# Altium PCB Can_Transceiver.PcbDoc
Units mm, origin at the board's own origin, x right, y up, seen from the top; angles counter-clockwise.
Board outline 52 x 25.75 mm, 2 copper layers (Top Layer, Bottom Layer); 13 components, 15 nets, 79 pads, 10 vias.
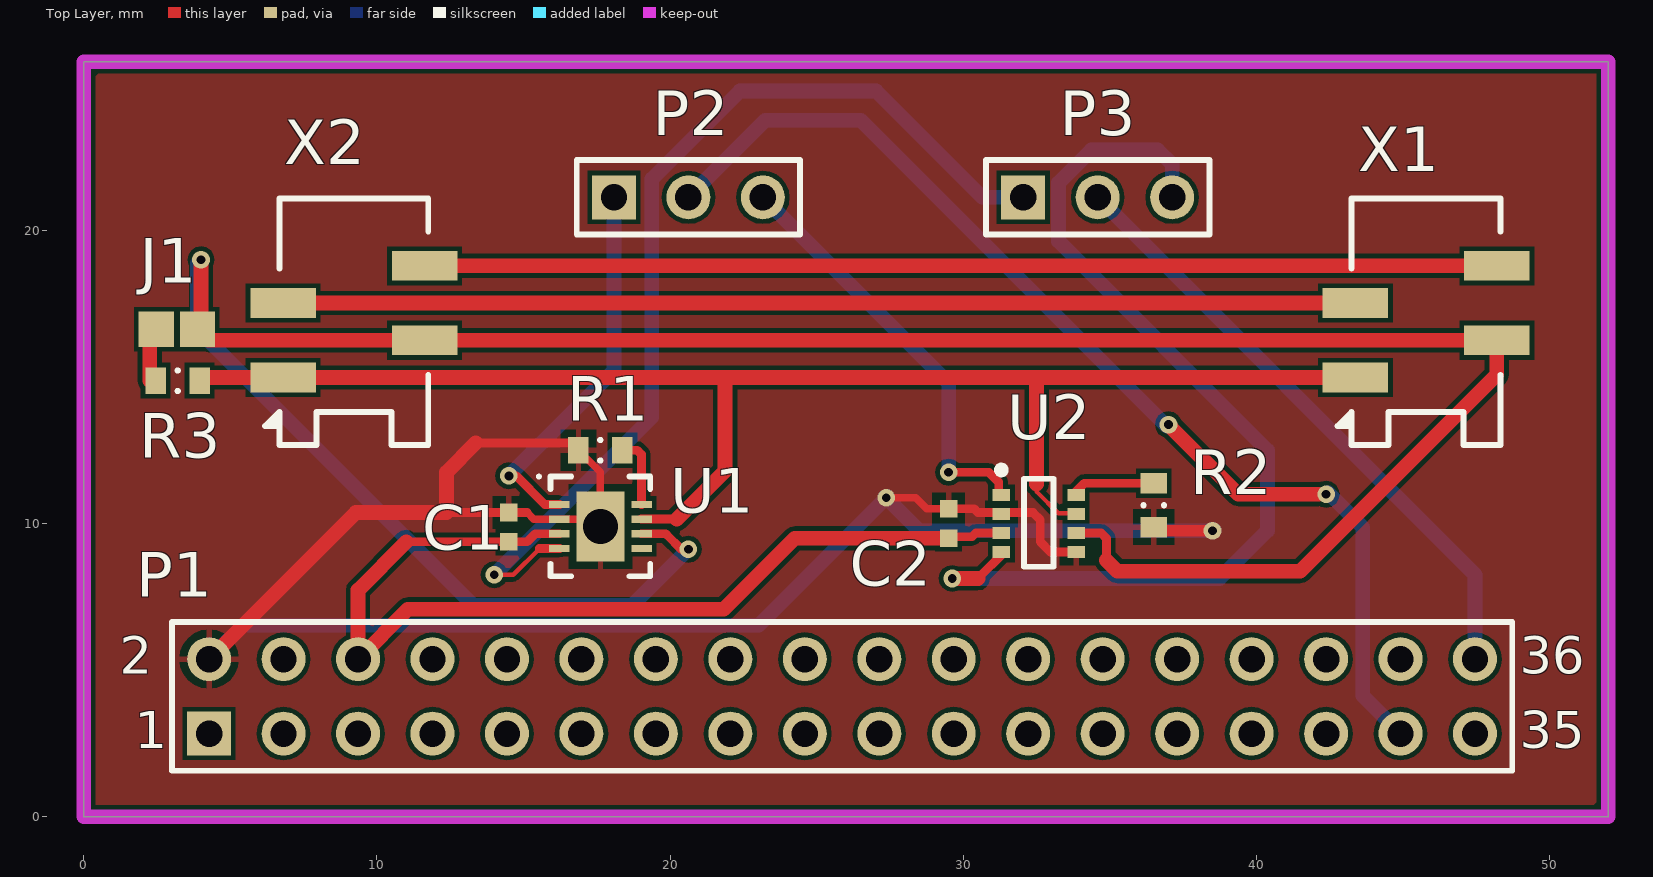
[diagram p0: Top Layer view]
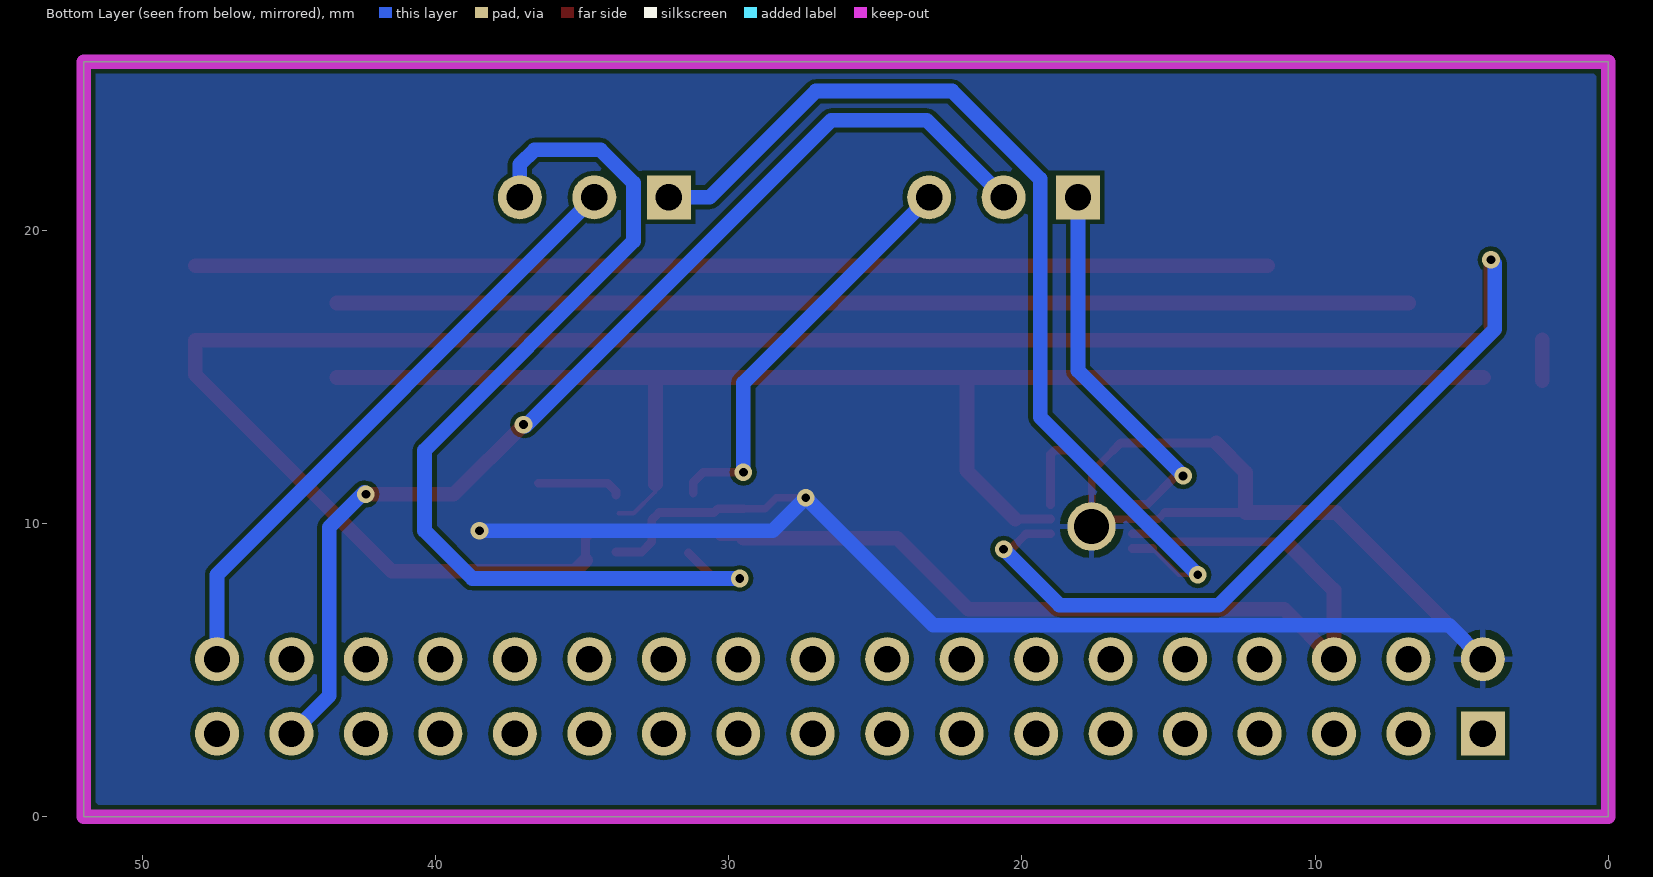
[diagram p1: Bottom Layer view, seen from below]

## Layer stack, top to bottom
Top Solder: solder mask 0.0102, Solder Resist, Dk 3.5
Top Layer: signal copper 0.0356
Dielectric1: dielectric 0.32, FR-4, Dk 4.8
Bottom Layer: signal copper 0.0356
Bottom Solder: solder mask 0.0102, Solder Resist, Dk 3.5

## Board outline
0,0 0,25.75 52,25.75 52,0

## Design rules (kind name [scope] priority, off if disabled: settings)
AcuteAngle [All] p1 off: minimum=8.80000000000000E+0001 checktracksonly=FALSE
Clearance Clearance_Normal [All] p1: gap=0.15
ComponentClearance [All] p1: gap=0.2 collisioncheckmode=3 verticalgap=0.2 showdistances=FALSE
FabricationTestPointUsage TestPointUsage [All] p1: valid=0 allowmultiple=FALSE
FabricationTestpoint Testpoint [All] p1: side=3 testpointundercomponent=TRUE minsize=1.016 maxsize=2.54 preferedsize=1.524 minholesize=0 maxholesize=1.016 preferedholesize=0.813 testpointgrid=0.025 allowsidetop=TRUE allowsidebottom=TRUE usegrid=TRUE gridtolerance=0
Height [All] p1 off: minheight=0 maxheight=25.4 prefheight=12.7
HoleSize [All] p1: absolutevalues=TRUE maxlimit=6 minlimit=0.3 maxpercent=80.000 minpercent=20.000
MinimumAnnularRing [All] p1: minimumring=0.15
MinimumSolderMaskSliver [All] p1: minsoldermaskwidth=0.2
PlaneClearance [All] p1: clearance=0.4
PlaneConnect [All] p1: planeconnectstyle=Relief reliefexpansion=0.508 reliefentries=4 reliefconductorwidth=0.2 reliefairgap=0.254
PolygonConnect PolygonConnect_Via [IsVia] p1: connectstyle=Direct reliefconductorwidth=0.254 reliefentries=4 polygonreliefangle="90 Angle" airgapwidth=0.254
PolygonConnect [All] p2: connectstyle=Relief reliefconductorwidth=0.2 reliefentries=4 polygonreliefangle="90 Angle" airgapwidth=0.254
RoutingCorners [All] p1: cornerstyle=45-Degree minsetback=1 maxsetback=2.54
RoutingVias [All] p1: holewidth=0.3 width=0.6 viastyle="Through Hole" minholewidth=0.3 minwidth=0.6 maxholewidth=1 maxwidth=4
SMDToCorner [All] p1 off: distance=78740
SMDToPlane [All] p1 off: distance=118110
SilkToSilkClearance [All] p1: silktosilkclearance=0.2
SilkToSolderMaskClearance SilkscreenOverComponentPads [IsPad] p1: minsilkscreentomaskgap=0.2 clearancetoexposedcopper=TRUE
SolderMaskExpansion SolderMaskExpansion_Via [isVia] p1: expansion=-5
SolderMaskExpansion [All] p2: expansion=0.05
ViasUnderSMD [All] p1: allowed=FALSE
Width [All] p1: maxlimit=5 minlimit=0.15 preferedwidth=0.2 minimp=50.000000 maximp=50.000000 favimp=50.000000
19 further rules are at their usual default settings.

## Components (designator, comment, footprint, x,y, rotation, side; value= is the part's Value field where it differs from the comment)
C1 "100nF" CAPC1005X05L 14.5,9.875 r90 top
C2 "100nF" CAPC1005X05L 29.5,10 r90 top
J1 "CC_SolderJP2_Medium" CC_SolderJP_M 3.175,16.625 r0 top
P1 "Header 18X2" HDR2X18 4.275,2.835 r0 top
P2 "Header 3" HDR1X3 18.085,21.125 r0 top
P3 "Header 3" HDR1X3 32.045,21.125 r0 top
R1 "0R" RESC1608X06L 17.625,12.5 r0 top
R2 "0R" RESC1608X06L 36.5,10.625 r90 top
R3 "120R" RESC1608X06L 3.2,14.875 r180 top
U1 "LTC2875" "8-Lead Plastic DFN (3mm x 3mm)" 17.625,9.9 r0 top
U2 "MAX3051" "SOT-23, 8L" 32.575,10.025 r0 top
X1 "MM4FVS" TYCO_7-188275-4 45.788,16.885 r90 top
X2 "MM4FVS" TYCO_7-188275-4 9.212,16.885 r90 top

## Footprints (in the part's own frame and the unit in brackets; to place one, negate y for a bottom-side part, rotate by r counter-clockwise, add the part's x,y. Pads: shape width x height; smd on the part's side, far side on the other; paste and mask are expansions set on the pad)
"8-Lead Plastic DFN (3mm x 3mm)" [mm] "DFN, 8-Leads, Body 3,00x3,00mm, Pitch 0,50mm, lPC Medium Density"
  rect 0.7x0.25 smd: 1(-1.4,0.75) 2(-1.4,0.25) 3(-1.4,-0.25) 4(-1.4,-0.75) 5(1.4,-0.75) 6(1.4,-0.25) 7(1.4,0.25) 8(1.4,0.75)
  rect 1.65x2.38 / inner rect 1.65x2.38 / far side round 1.65 hole 1.2: 9(0,0)
  silkscreen extent -2.15,-1.7 1.7,1.75, body extent -1.55,-1.55 1.55,1.55, height 0.8
CAPC1005X05L [mm] "Chip Capacitor, Body 1.1x0.5mm, IPC High Density, EIA 0402"
  rect 0.6x0.6 smd: 1(-0.5,0) 2(0.5,0)
  body extent -0.55,-0.3 0.55,0.3, height 0.6
CC_SolderJP_M [mm] "Medium Solder Jumper 2 leads"
  rect 1.2x1.2 smd paste-0.6 mask+0.05: 1(-0.7,0) 2(0.7,0)
  body extent -1.25,-0.55 1.25,0.55, height 0.4
HDR1X3 [mm] "Connector; Header; 3 Position"
  rect 1.5x1.5 hole 0.9: 1(0,0)
  round 1.5 hole 0.9: 2(2.54,0) 3(5.08,0)
  silkscreen extent -1.27,-1.27 6.35,1.27
HDR2X18 [mm] "Connector; Header; 18x2 Position"
  rect 1.5x1.5 hole 0.9: 1(0,0)
  round 1.5 hole 0.9: 2(0,2.54) 3(2.54,0) 4(2.54,2.54) 5(5.08,0) 6(5.08,2.54) 7(7.62,0) 8(7.62,2.54) 9(10.16,0) 10(10.16,2.54) 11(12.7,0) 12(12.7,2.54) 13(15.24,0) 14(15.24,2.54) 15(17.78,0) 16(17.78,2.54) 17(20.32,0) 18(20.32,2.54) 19(22.86,0) 20(22.86,2.54) 21(25.4,0) 22(25.4,2.54) 23(27.94,0) 24(27.94,2.54) 25(30.48,0) 26(30.48,2.54) 27(33.02,0) 28(33.02,2.54) 29(35.56,0) 30(35.56,2.54) 31(38.1,0) 32(38.1,2.54) 33(40.64,0) 34(40.64,2.54) 35(43.18,0) 36(43.18,2.54)
  silkscreen extent -1.27,-1.27 44.45,3.81
RESC1608X06L [mm] "Chip Resistor, Body 1.6x0.8mm, IPC High Density, EIA 0603"
  rect 0.7x0.9 smd: 1(-0.75,0) 2(0.75,0)
  silkscreen extent -0.01,-0.35 0.01,0.35, body extent -0.85,-0.48 0.85,0.48, height 0.6
"SOT-23, 8L" [mm] "SOT23, 8-Leads, MAXIM 21-0078"
  rect 0.6x0.4 smd: 1(-1.275,0.95) 2(-1.275,0.3) 3(-1.275,-0.35) 4(-1.275,-1) 5(1.275,-1) 6(1.275,-0.35) 7(1.275,0.3) 8(1.275,0.95)
  silkscreen extent -1.4,-1.5 0.5,1.92, body extent -0.88,-1.5 0.87,1.5, height 1.45
TYCO_7-188275-4 [mil] "Micro-Match 4 pins Female on board Vertical Smd connector"
  rect 40x87.99 smd: 1(-75,95) 2(-25,-95) 3(25,95) 4(75,-95)
  silkscreen extent -166,-100 166,119, body extent -167,-136 167,136, height 333

## Part data
C1 C2: library part 100nF[[/\]]0402[[/\]]1, "Capacitor"
J1: "Medium Solder Jumper 2 leads"
P1: "Header, 18-Pin, Dual row"
P2 P3: "Header, 3-Pin"
R1 R2: library part 0R[[/\]]0603[[/\]]1, "Resistor"
R3: library part 120R[[/\]]0603[[/\]]1, "Resistor"
X1 X2: library part MM4FVS[[/\]]1, "Micro-Match 4 pins Female on board Vertical Smd connector"

## Via types
v1: diameter 0.6, hole 0.3, Top Layer to Bottom Layer, 10 vias

## Nets (pads, with @x,y where several pads share a name; then routed paths per layer and width w, separated by ;. In a path a pad name is that pad's centre, name@x,y a point inside that pad or via, vN(x,y) a via of type N, cw(c..) or ccw(c..) an arc to the next point about the centre after c; other vN are vias at no path point)
CANH: R3.1 U1.7 U2.7 X1.1 X2.1 | length 51.3
  Top Layer w0.15: 32.5,11.35 32.5,11.089 33.239,10.35 U2.7@33.75,10.35
  Top Layer w0.3: U1.7 20.225,10.15
  Top Layer w0.5: R3.1@4.255,14.98 X2.1 21.875,14.98 ; 20.225,10.15 21.875,11.8 21.875,14.98 ; 32.5,11.35 32.5,14.98 ; X1.1 32.5,14.98 ; 21.875,14.98 32.5,14.98
CANL: J1.2 U1.6 U2.6 X1.2 X2.2 | length 91.7
  Top Layer w0.3: U1.6 19.85,9.65 ; 19.875,9.625 20.375,9.125 v1(20.625,9.125) ; U2.6 34.706,9.675 34.881,9.5 34.881,8.744
  Top Layer w0.5: J1.2 4.25,16.25 X2.2 X1.2 48.201,15.076 41.5,8.375 35.25,8.375 34.881,8.744 ; J1.2@4,16.75 v1(4,19)
  Bottom Layer w0.5: v1(4,19) 3.875,18.875 3.875,16.625 13.285,7.215 18.715,7.215 v1(20.625,9.125)
GND: C1.2 C2.2 P1.2 R1.1 R2.1 U1.2 U1.9 U2.2 U2.5 | length 71.6
  Top Layer w0.254: 15.125,10.375 15.35,10.15 U1.2 17.375,10.15 U1.9 17.625,11.75 R1.1 ; v1(27.375,10.875) 28.375,10.875 28.75,10.5 C2.2
  Top Layer w0.3: 12.375,10.375 15.125,10.375 ; 13.375,12.75 16.625,12.75 R1.1 ; C2.2 30.375,10.5 30.5,10.375 32.375,10.375 32.625,10.125 32.625,9.375 32.975,9.025 U2.5
  Top Layer w0.4: R2.1@36.5,9.75 v1(38.5,9.75)
  Top Layer w0.5: P1.2 9.275,10.375 12.375,10.375 12.375,11.75 13.375,12.75
  Bottom Layer w0.5: P1.2 5.425,6.525 23.025,6.525 v1(27.375,10.875) 28.5,9.75 v1(38.5,9.75)
NetJ1_1: J1.1 R3.2 | length 1.4
  Top Layer w0.5: R3.2@2.25,14.875 J1.1@2.25,16.27
NetR1_2: R1.2 U1.8 | length 2.4
  Top Layer w0.3: R1.2 18.875,12.5 19.025,12.35 U1.8
NetR2_2: R2.2 U2.8 | length 2.9
  Top Layer w0.3: U2.8 33.85,11.1 34.125,11.375 R2.2
NetX1_3: X1.3 X2.3 | length 36.6
  Top Layer w0.5: X2.3 X1.3
NetX1_4: X1.4 X2.4 | length 36.6
  Top Layer w0.5: X2.4 X1.4
RX: P1.36 P3.2 | length 21.1
  Bottom Layer w0.5: P3.2 47.455,8.255 P1.36
RX_LTC: P3.1 U1.4 | length 33.7
  Top Layer w0.15: v1(14,8.25) 14.65,8.25 ; 14.65,8.25 15.55,9.15
  Top Layer w0.3: 15.55,9.15 U1.4
  Bottom Layer w0.5: v1(14,8.25) 19.375,13.625 19.375,21.75 22.375,24.75 27.026,24.75 30.651,21.125 P3.1
RX_MAX: P3.3 U2.4 | length 34
  Top Layer w0.3: 30.5,8.125 U2.4@31.375,9
  Top Layer w0.5: v1(29.625,8.125) 30.5,8.125
  Bottom Layer w0.5: v1(29.625,8.125) 38.75,8.125 40.375,9.75 40.375,12.5 33.25,19.625 33.25,21.625 34.375,22.75 36.625,22.75 37.125,22.25 P3.3
TX: P1.33 P2.2 | length 37.3
  Top Layer w0.254: v1@42.125,11 v1(42.375,11)
  Top Layer w0.5: v1(37,13.375) 39.375,11 v1@42.125,11
  Bottom Layer w0.5: P2.2 23.25,23.75 26.5,23.75 v1@36.938,13.313 ; v1@42.437,11.063 43.625,9.875 43.625,4.125 P1.33
TX_LTC: P2.1 U1.1 | length 13.1
  Top Layer w0.3: v1(14.5,11.625) 14.75,11.625 15.725,10.65 U1.1
  Bottom Layer w0.5: v1(14.5,11.625) 18.085,15.21 P2.1
TX_MAX: P2.3 U2.1 | length 14.2
  Top Layer w0.3: v1(29.5,11.75) 30.875,11.75 31.212,11.413 U2.1@31.212,11.038
  Bottom Layer w0.5: P2.3 29.5,14.79 v1(29.5,11.75)
VCC: C1.1 C2.1 P1.6 U1.3 U2.3 | length 33.7
  Top Layer w0.3: 11,9.375 15.125,9.375 15.4,9.65 U1.3 ; C2.1@29.55,9.55 30.3,9.55 30.425,9.675 U2.3
  Top Layer w0.5: 11,9.375 9.355,7.73 P1.6 11.055,7.075 21.825,7.075 24.25,9.5 C2.1
pads on no net: P1.1 P1.3 P1.4 P1.5 P1.7 P1.8 P1.9 P1.10 P1.11 P1.12 P1.13 P1.14 P1.15 P1.16 P1.17 P1.18 P1.19 P1.20 P1.21 P1.22 P1.23 P1.24 P1.25 P1.26 P1.27 P1.28 P1.29 P1.30 P1.31 P1.32 P1.34 P1.35 U1.5

## Polygon pours and split planes (outlines as drawn)
GND on Top Layer "Top Layer-No Net" (solid, pour order 5): 0,25.75 0,0 52,0 52,25.75
GND on Bottom Layer "Top Layer-No Net" (solid, pour order 7): 0,25.75 0,0 52,0 52,25.75

## Keep-outs
Keep-Out Layer:
  the board outline again, w0.5

## Silkscreen, mask and mechanical layers (free items; w line width, h text height)
Top Solder:
  circle w0.5: c31.425,12.325 r0.2
  circle w0.5: c42.6,13.475 r0.2
  circle w0.5: c18,23.425 r0.2
  circle w0.5: c31.85,23.275 r0.2
  circle w0.5: c15.725,11.9 r0.2
  circle w0.5: c6,13 r0.2
  text "LTC2875" at 10.275,23 h1.52
  text "Tx" at 20,23 h1.52
  text "Rx" at 34,23 h1.52
  text "Max3051" at 39.7,22.95 h1.52
  text "CanL" at 14.175,16.025 h0.7
  text "CanH" at 14.175,14.75 h0.7
  text "2" at 1.725,5 h1.52
  text "36" at 48.825,4.975 h1.52
  text "1" at 1.675,2.375 h1.52
  text "35" at 48.875,2.375 h1.52
Bottom Solder:
  text "CAN Transceiver Rev. A" at 51.1,23.875 h1.52
  text "16.03.15" at 51.075,22.1 h1.52
  text "D. Konrad" at 51.05,20.4 h1.52
Outline:
  the board outline again, w0.2
Drill Drawing:
  text ".Legend" at -15.725,-29.45 h2

## Text inside footprints (layer, text, board x,y; h text height)
P1: Top Overlay "2" at 1.227,4.867 h1.27; Top Overlay "1" at 1.735,2.327 h1.27; Top Overlay "35" at 48.979,2.327 h1.27; Top Overlay "36" at 48.979,4.867 h1.27